# EAGLE board ArduinoSmarticle (EAGLE 7.2.0)
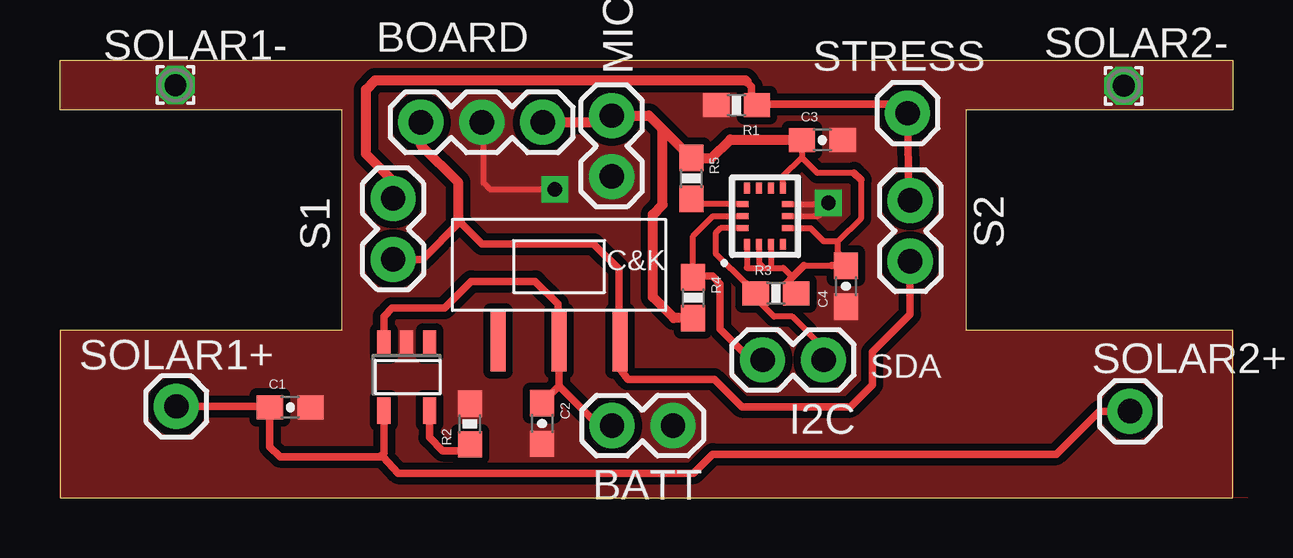
[diagram p0: board, top side]
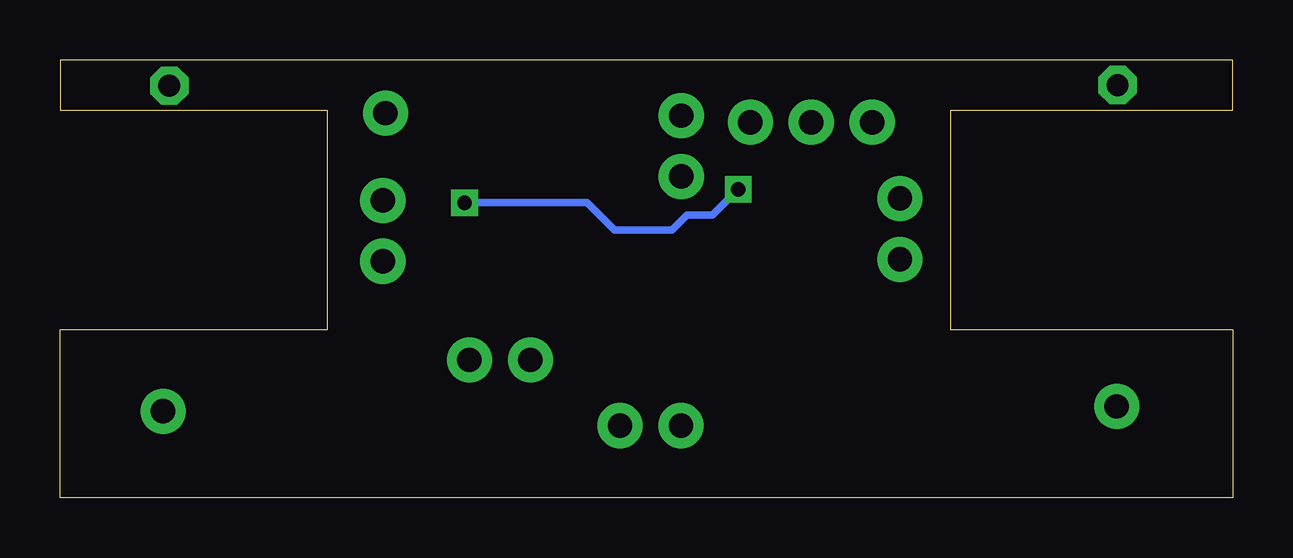
[diagram p1: board, bottom side, seen from below]

Size 48.9 x 18.25 mm. Coordinates in mm from the lower left corner, seen from the top.
Outline: 0,0 48.9,0 48.9,7 37.75,7 37.75,16.15 48.9,16.15 48.9,18.25 0,18.25 0,16.15 11.75,16.15 11.75,7 0,7 0,0
Copper layers (1*16): Top 0.035mm / dielectric 1.5mm / Bottom 0.035mm
Design rules "SparkFun *": minimum track width 8mil, minimum drill 20mil, track to track 8mil, track to pad 8mil, pad to pad 8mil, via to via 8mil, smd to smd 8mil, copper to edge 0mil, drill to drill 8mil, minimum pad ring 12mil, minimum via ring 10mil, stop-mask expansion 4mil, vias tented up to drill 20mil, thermal gap 10mil

## Footprints (pad centres in the part's own frame; a part is rotated, then mirrored left to right if it is on the bottom)
1X02 = drill 1.016 pad 1.88: 1 0,0; 2 2.54,0
1X03 = drill 1.016 pad 1.88: 1 0,0; 2 2.54,0; 3 5.08,0
0603-CAP = smd 1.1 x 1: 1 -0.85,0; 2 0.85,0
0603-RES = smd 1.1 x 1: 1 -0.85,0; 2 0.85,0
0603 = smd 1.1 x 1: 1 -0.85,0; 2 0.85,0
1X01 = drill 1.016 pad 1.88: 1 0,0
1,6/0,9 = drill 0.914 pad 1.6 octagon: 1 0,0
SOT23-5 = smd 0.55 x 1.1: 1 -0.95,-1.3; 2 0,-1.3; 3 0.95,-1.3; 4 0.95,1.5; 5 -0.95,1.5
LGA14L_DOT_INDICATOR = smd 0.45 x 0.25: 1 -1.175,0.75; 2 -1.175,0.25; 3 -1.175,-0.25; 4 -1.175,-0.75; 8 1.175,-0.75; 9 1.175,-0.25; 10 1.175,0.25; 11 1.175,0.75 | smd 0.25 x 0.45: 5 -0.5,-0.925; 6 0,-0.925; 7 0.5,-0.925; 12 0.5,0.925; 13 0,0.925; 14 -0.5,0.925
WILL-BLACKSLIDESWITCH = smd 2.54 x 0.635: CONN 5.08,6.985; NC 5.08,1.905; V+ 5.08,4.445

## Placement (x,y rotation side)
BATT  [1X02]  23.01,3 0 top
BOARD  [1X03]  20.12,15.65 180 top
C1  4.7uF  [0603-CAP]  9.6,3.76 0 top
C2  4.7uF  [0603-CAP]  20.09,3.09 270 top
C3  .1uF  [0603-CAP]  31.78,14.91 0 top
C4  .1uF  [0603-CAP]  32.77,8.81 90 top
I2C  [1X02]  31.83,5.74 180 top
MIC  [1X02]  23,15.93 270 top
R1  1  [0603-RES]  28.2,16.36 0 top
R2  12k  [0603]  17.09,3.07 90 top
R3  10k  [0603-RES]  29.84,8.51 0 top
R4  10k  [0603-RES]  26.39,8.33 270 top
R5  10k  [0603-RES]  26.31,13.31 270 top
S1  [1X02]  13.88,12.48 270 top
S2  [1X02]  35.44,12.39 270 top
SOLAR1+  [1X01]  4.85,3.8 0 top
SOLAR1-  [1,6/0,9]  4.81,17.2 0 top
SOLAR2+  [1X01]  44.6,3.6 0 top
SOLAR2-  [1,6/0,9]  44.34,17.18 0 top
SOLARCHIP  MCP73831  [SOT23-5]  14.45,5.13 180 top
STRESS  [1X01]  35.33,16.03 0 top
U1  LSM6DS3DOT_INDICATION  [LGA14L_DOT_INDICATOR]  29.39,11.73 90 top
U$1  WILL-BLACKSLIDESWITCH  [WILL-BLACKSLIDESWITCH]  16.36,11.61 270 top

## Library data of the parts
BATT BOARD I2C MIC S1 S2 SOLAR1+ SOLAR2+ STRESS = SparkFun-Connectors
C1-C4 = SparkFun-Capacitors; PROD_ID: CAP-08280
R1 = SparkFun-Resistors; PROD_ID: RES-08296
R2 = SparkFun-Resistors; PROD_ID: RES-09570; VALUE: 10.5k
R3 = SparkFun-Resistors; PROD_ID: RES-07857; VALUE: 4.7K
R4 R5 = SparkFun-Resistors; PROD_ID: RES-07857
SOLAR1- SOLAR2- = wirepad
SOLARCHIP = GeekAmmo
U1 = LSM6DS3; PROD_ID: IC-12969
U$1 = Will-Switch

## Nets
GND: BATT.2 BOARD.2 C1.2 C2.2 C3.2 C4.1 MIC.2 R1.1 R2.2 SOLAR1-.1 SOLAR2-.1 SOLARCHIP.2 U1.6 U1.7
N$2: R5.2 U1.12
N$5: R2.1 SOLARCHIP.5
SCL: I2C.2 R4.1 U1.13
SDA: I2C.1 R3.1 U1.14
SERVOGND: R1.2 S1.1 S2.1 STRESS.1
SOLAR+: C1.1 SOLAR1+.1 SOLAR2+.1 SOLARCHIP.4
SWITCH+: BATT.1 C2.1 SOLARCHIP.3 U$1.V+
V_BATT: BOARD.3 S1.2 S2.2 U$1.CONN
VCC: BOARD.1 C3.1 C4.2 MIC.1 R3.2 R4.2 R5.1 U1.1 U1.2 U1.3 U1.5 U1.8

## Tracks (layer width: path | path; a pad name or v marks a point on that pad's centre or on a via)
GND  (via drill 0.6)
  Top 0.254: U1.7 31.58,12.23 | U1.6 31.57,11.73 | v20.62,12.85 17.93,12.85 17.65,13.13 17.65,15.58 BOARD.2
  Top 0.305: 31.62,11.79 31.62,12.19 31.58,12.23 31.97,12.23 v32.03,12.29
  Bottom 0.305: v32.03,12.29 26.92,12.29 25.78,11.15 23.39,11.15 22.76,11.79 21.69,11.79 v20.62,12.85
  pour Top (isolate 0.305, no thermals): 0,0 0,7 11.75,7 11.75,16.15 0,16.15 0,18.25 48.9,18.25 48.9,16.15 37.75,16.15 37.75,7 48.9,7 48.9,0.02 49.5,0
N$2
  Top 0.254: U1.12 26.54,12.23 R5.2
N$5
  Top 0.305: 17.35,2.05 R2.1 16.82,1.96 15.95,1.96 15.4,2.5 SOLARCHIP.5
SCL
  Top 0.254: R4.1 26.39,10.9 27.23,11.73 U1.13
  Top 0.305: R4.1 26.72,9.18 26.77,9.23 27.19,9.23 27.51,8.91 27.51,7.04 28.42,6.12 29.21,6.12 I2C.2
SDA
  Top 0.254: U1.14 27.54,11.23 27.33,11.02 27.33,10.19 28.61,8.9 | R3.1 29,8.32 29.77,7.54 30.53,7.54 31.83,6.25 I2C.1
  Top 0.305: R3.1 28.61,8.9
SERVOGND
  Top 0.305: 28.63,17.35 28.83,17.14 28.83,16.78 R1.2 29.11,16.41 34.95,16.41 STRESS.1 35.38,12.45 S2.1
  Top 0.406: S1.1 13.88,13.19 12.75,14.33 12.75,17.02 13.13,17.4 28.57,17.4 28.63,17.35
SOLAR+
  Top 0.305: SOLAR1+.1 8.71,3.8 C1.1 8.75,2.12 9.17,1.7 13.33,1.7 | SOLARCHIP.4 13.5,1.87 13.33,1.7 | 13.33,1.7 13.46,1.7 14.1,1.02 26.42,1.02 27.2,1.8 41.53,1.8 43.33,3.6 SOLAR2+.1
SWITCH+
  Top 0.305: 20.8,4.65 U$1.V+ 20.75,6.58 20.75,8.08 19.81,9.02 17.14,9.02 16.03,7.9 13.84,7.9 13.5,7.56 SOLARCHIP.3 | 20.8,4.65 C2.1 | 20.8,4.65 22.45,3 BATT.1
V_BATT
  Top 0.305: S1.2 15.12,9.94 16.66,11.48 16.66,11.51 17.6,10.57 22.24,10.57 22.25,10.57 23.29,9.53 23.29,6.58 U$1.CONN 23.22,6.4 23.22,5.54 23.67,4.93 27.28,4.93 28.42,3.79 32.94,3.79 33.86,4.7 33.86,6.07 35.43,7.64 S2.2
  Top 0.406: BOARD.3 15.04,14.7 16.59,13.16 16.59,11.58 16.66,11.51
VCC
  Top 0.254: 33.1,13.54 31.57,13.54 30.93,14.19 | C3.1 30.93,14.19 | 33.38,13.26 33.38,11.63 32.44,10.69 | U1.5 31.29,11.23 31.83,10.69 32.44,10.69 | 31.01,9.68 32.17,9.68 32.97,9.68 32.44,10.21 32.44,10.69 | U1.8 30.14,13.4 30.93,14.19 | U1.2 29.14,9.78 29.34,9.58 | 29.34,9.58 29.69,9.58 | 29.69,9.58 30.15,9.58 30.53,9.2 | U1.3 29.64,9.63 29.69,9.58 | U1.1 28.64,9.59 28.63,9.58 29.34,9.58
  Top 0.305: R3.2 30.31,8.98 30.53,9.2 31.01,9.68 | 32.17,9.68 C4.2 | 33.1,13.54 33.38,13.26
  Top 0.406: BOARD.1 22.72,15.65 MIC.1 24.55,15.93 25.13,15.35 | 25.13,15.35 R5.1 27.16,14.16 27.94,14.94 30.9,14.94 C3.1 | R4.2 25.59,7.48 24.71,8.36 24.71,11.81 25.12,12.22 25.12,15.34 25.13,15.35

## Text on the board
tPlace: SDA